# Altium PCB HLK-W806-KIT-V1.0.PcbDoc
Units mm, origin at the board's own origin, x right, y up, seen from the top; angles counter-clockwise.
Board outline 64 x 26 mm, 2 copper layers (Top Layer, Bottom Layer); 35 components, 59 nets, 194 pads, 212 vias.
Unrouted connection lines stored in the file: 23.
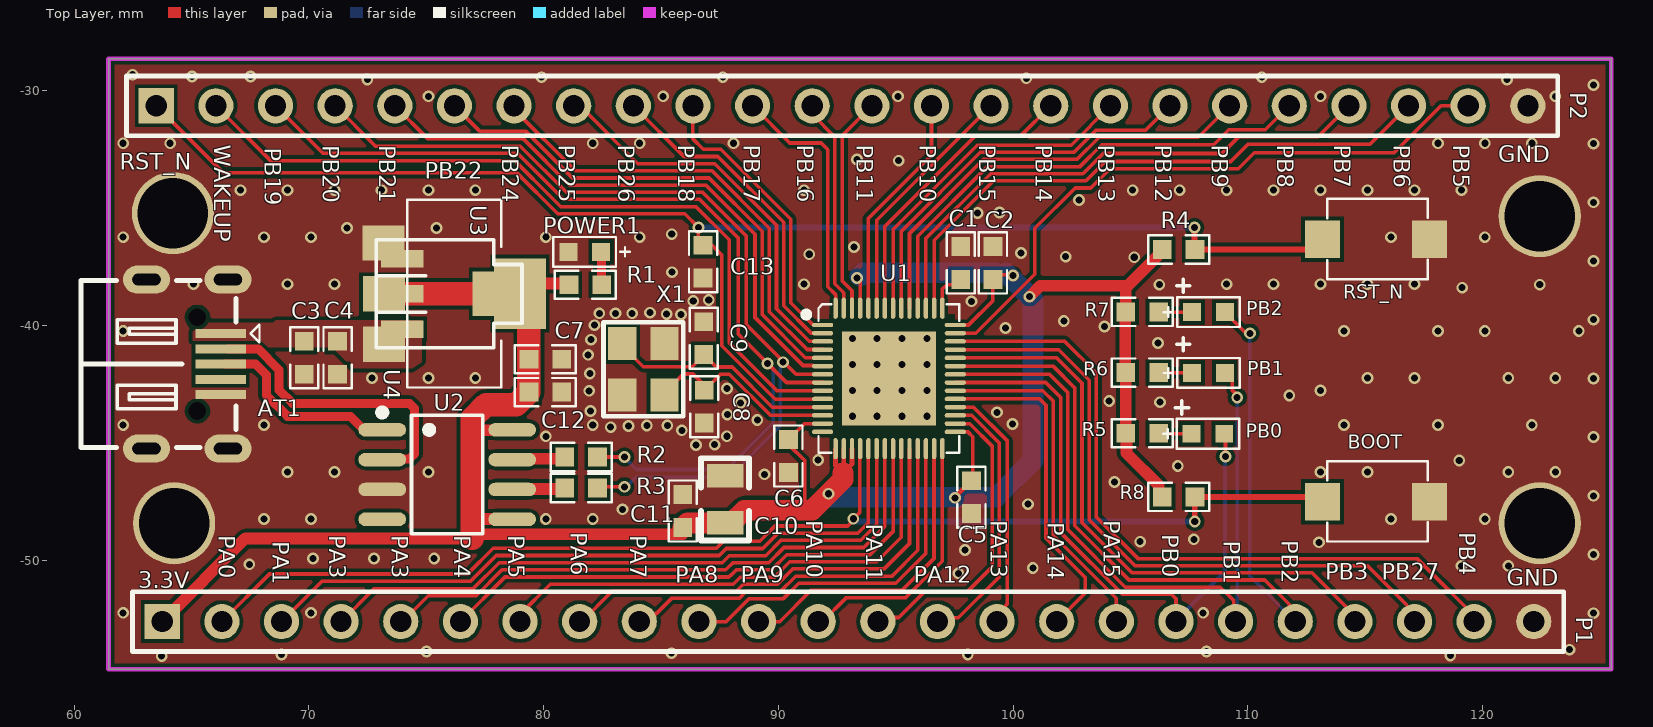
[diagram p0: Top Layer view]
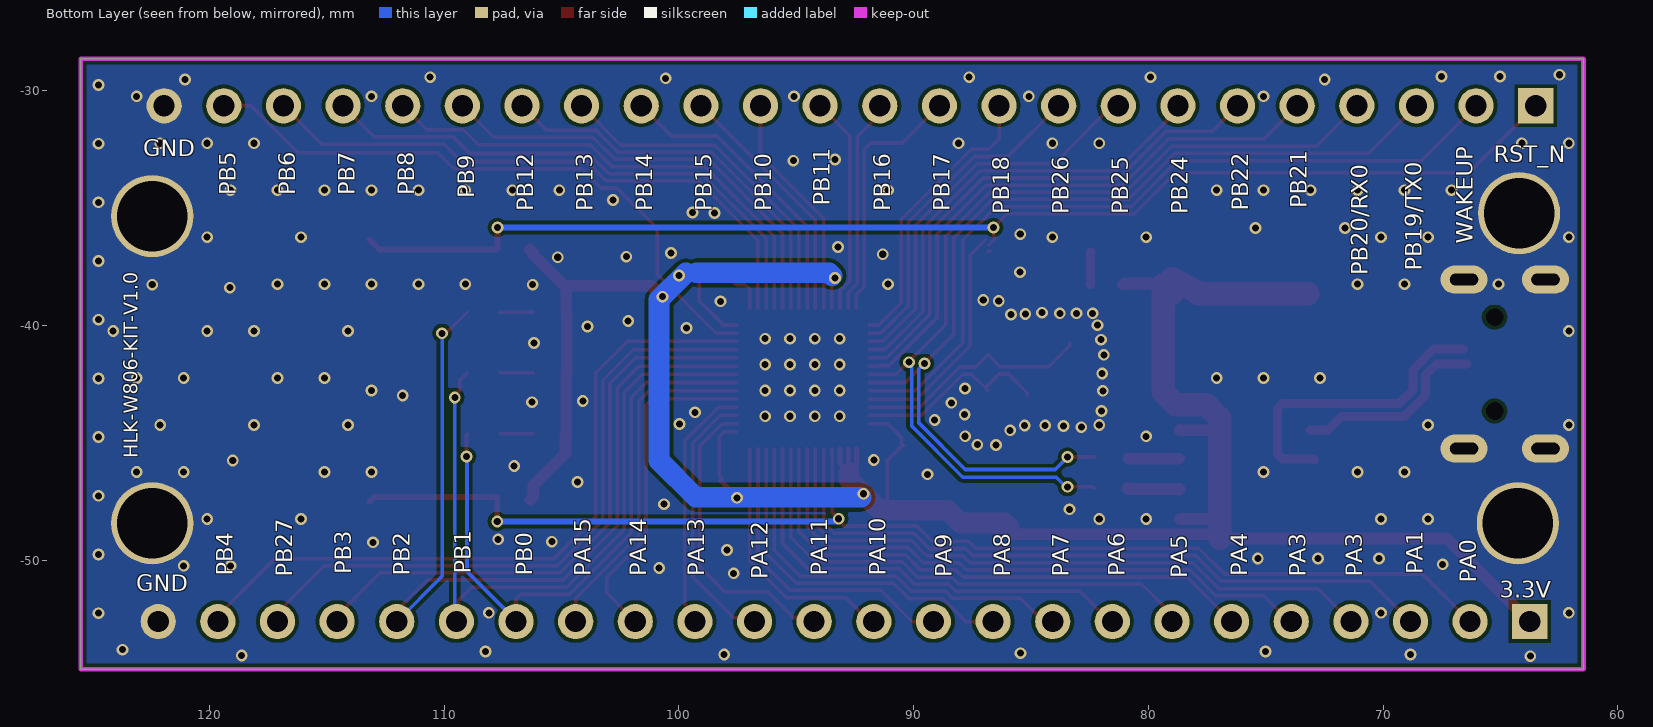
[diagram p1: Bottom Layer view, seen from below]

## Layer stack, top to bottom
Top Solder: solder mask 0.0102, Solder Resist, Dk 3.5
Top Layer: signal copper 0.0356
Dielectric 1: dielectric 0.32, FR-4, Dk 4.8
Bottom Layer: signal copper 0.0356
Bottom Solder: solder mask 0.0102, Solder Resist, Dk 3.5

## Board outline
61.468,-54.635 125.468,-54.635 125.468,-28.635 61.468,-28.635

## Design rules (kind name [scope] priority, off if disabled: settings)
Clearance [All] p1: gap=0.152 ignorepadtopadclearanceinfootprint=FALSE
PlaneConnect PlaneConnect_1 [InNet('5V')] p1: planeconnectstyle=Direct reliefexpansion=0.508 reliefentries=4 reliefconductorwidth=0.254 reliefairgap=0.254
PlaneConnect [All] p2: planeconnectstyle=Direct reliefexpansion=0.508 reliefentries=4 reliefconductorwidth=0.254 reliefairgap=0.254
PolygonConnect PolygonConnect_1 [InNet('5V')] p1: connectstyle=Direct reliefconductorwidth=0.254 reliefentries=4 polygonreliefangle="90 Angle" airgapwidth=0.254
PolygonConnect [All] p2: connectstyle=Direct reliefconductorwidth=0.254 reliefentries=4 polygonreliefangle="90 Angle" airgapwidth=0.254
RoutingVias [All] p1: holewidth=0.3 width=0.5 viastyle="Through Hole" minholewidth=0.3 minwidth=0.5 maxholewidth=0.5 maxwidth=0.7
SolderMaskExpansion [All] p1: expansion=0.102 istentingtop=FALSE
Width PWER [InNetClass('PWER')] p1: maxlimit=1 minlimit=0.5 preferedwidth=0.75
Width XINHAO [InNetClass('XINHAO')] p2: maxlimit=1 minlimit=0.254 preferedwidth=0.5
Width [All] p3: maxlimit=1 minlimit=0.152 preferedwidth=0.254
29 further rules are at their usual default settings.

## Components (designator, comment, footprint, x,y, rotation, side; value= is the part's Value field where it differs from the comment)
AT1 "micro usb" USB-MICRO_D 63.083,-41.635 r270 top
BOOT "按键" 正按小龟 113.179,-47.498 r0 top (schematic designator key1)
C1 "4.7pF" 0603 97.765,-37.327 r90 top
C2 "0.1uF" 0603 99.136,-37.327 r270 top
C3 "10UF" 0603_1 69.799,-41.365 r90 top
C4 "0.1UF" 0603_1 71.222,-41.365 r90 top
C5 "0.1uF" 0603 98.221,-47.301 r90 top
C6 "1uF" 0603 90.424,-45.551 r270 top
C7 "0.1UF" 0603_1 80.072,-41.428 r180 top
C8 "15pF" 0603 86.844,-43.449 r90 top
C9 "15pF" 0603 86.82,-40.528 r90 top
C10 "47uF" R0805 87.732,-47.396 r90 top
C11 "0.1uF" 0603 85.928,-47.893 r90 top
C12 "10UF" 0603_1 80.072,-42.825 r180 top value=100pF
C13 "0.1uF" 0603 86.792,-37.273 r270 top
P1 "Header 24" HDR1X24 63.754,-52.604 r0 top
P2 "Header 24" HDR1X24 63.5,-30.633 r0 top
PB0 "" 0603LED 107.594,-44.602 r0 top
PB1 "" 0603LED 107.62,-42.012 r0 top
PB2 "" 0603LED 107.62,-39.421 r0 top
POWER1 "" 0603LED 82.448,-36.855 r180 top
R1 "4.7K" 0603_1 81.777,-38.252 r0 top
R2 "0" 0603_1 81.599,-45.593 r0 top
R3 "0" 0603_1 81.599,-46.914 r0 top
R4 "10K" 0603_1 107.047,-36.754 r180 top
R5 "4.7K" 0603_1 105.497,-44.583 r0 top
R6 "4.7K" 0603_1 105.497,-41.999 r0 top
R7 "4.7K" 0603_1 105.497,-39.414 r0 top
R8 "10K" 0603_1 107.047,-47.295 r0 top
RST_N "按键" 正按小龟 113.179,-36.322 r0 top (schematic designator key2)
U1 "Component_1" "LCC56 - duplicate1" 94.709,-42.245 r0 top
U2 "CH340N" SOP8 75.918,-46.212 r270 top
U3 "AMS1117-3.3" AMS1117 75.819,-38.761 r90 top
U4 "AMS1117-3.3" SOT223 76.2,-38.253 r0 top
X1 "XTAL_40MHz" SMD-3225 84.252,-41.859 r270 top

## Footprints (in the part's own frame and the unit in brackets; to place one, negate y for a bottom-side part, rotate by r counter-clockwise, add the part's x,y. Pads: shape width x height; smd on the part's side, far side on the other; paste and mask are expansions set on the pad)
0603 [mm]
  rect 0.8x0.8 smd: 1(-0.7,0) 2(0.7,0)
  silkscreen extent -1.3,-0.6 1.3,0.6
0603_1 [mm]
  rect 0.8x0.8 smd: 1(-0.7,0) 2(0.7,0)
  silkscreen extent -1.3,-0.6 1.3,0.6
0603LED [mil] "0603贴片LED"
  rect 30x30 smd: 1(0,0) 2(55,0)
  silkscreen extent -48,-25 80,25
AMS1117 [mm]
  rect 1.9x1.8 smd: 0(0.118,-2.059)
  rect 0.75x1.8 smd: 1(1.618,1.841) 2(0.118,1.841) 3(-1.382,1.841)
  silkscreen extent -2.18,-3.26 2.42,2.94, body extent -2.13,-2.23 2.37,1.77, height 1.5
HDR1X24 [mm] "Connector; Header; 24 Position"
  rect 1.5x1.5 hole 0.9: 1(0,0)
  round 1.5 hole 0.9: 2(2.54,0) 3(5.08,0) 4(7.62,0) 5(10.16,0) 6(12.7,0) 7(15.24,0) 8(17.78,0) 9(20.32,0) 10(22.86,0) 11(25.4,0) 12(27.94,0) 13(30.48,0) 14(33.02,0) 15(35.56,0) 16(38.1,0) 17(40.64,0) 18(43.18,0) 19(45.72,0) 20(48.26,0) 21(50.8,0) 22(53.34,0) 23(55.88,0) 24(58.42,0)
  silkscreen extent -1.27,-1.27 59.69,1.27
"LCC56 - duplicate1" [mm]
  oval 0.9x0.19 smd: 1(-2.825,2.275) 2(-2.825,1.925) 3(-2.825,1.575) 4(-2.825,1.225) 5(-2.825,0.875) 6(-2.825,0.525) 7(-2.825,0.175) 8(-2.825,-0.175) 9(-2.825,-0.525) 10(-2.825,-0.875) 11(-2.825,-1.225) 12(-2.825,-1.575) 13(-2.825,-1.925) 14(-2.825,-2.275) 29(2.825,-2.275) 30(2.825,-1.925) 31(2.825,-1.575) 32(2.825,-1.225) 33(2.825,-0.875) 34(2.825,-0.525) 35(2.825,-0.175) 36(2.825,0.175) 37(2.825,0.525) 38(2.825,0.875) 39(2.825,1.225) 40(2.825,1.575) 41(2.825,1.925) 42(2.825,2.275)
  oval 0.19x0.9 smd: 15(-2.275,-2.99) 16(-1.925,-2.99) 17(-1.575,-2.99) 18(-1.225,-2.99) 19(-0.875,-2.99) 20(-0.525,-2.99) 21(-0.175,-2.99) 22(0.175,-2.99) 23(0.525,-2.99) 24(0.875,-2.99) 25(1.225,-2.99) 26(1.575,-2.99) 27(1.925,-2.99) 28(2.275,-2.99) 43(2.275,2.99) 44(1.925,2.99) 45(1.575,2.99) 46(1.225,2.99) 47(0.875,2.99) 48(0.525,2.99) 49(0.175,2.99) 50(-0.175,2.99) 51(-0.525,2.99) 52(-0.875,2.99) 53(-1.225,2.99) 54(-1.575,2.99) 55(-1.925,2.99) 56(-2.275,2.99)
  rect 4x4 smd mask+0.051: 57(0,0)
  silkscreen extent -3,-3.16 3,3.16
R0805 [mm]
  rect 1x1.55 smd: 1(-1,0) 2(1,0)
  silkscreen extent -1.75,-1.02 1.75,1.02
SMD-3225 [mm]
  rect 1.4x1.2 smd: 1(-1.1,-0.9) 2(1.1,-0.9) 3(1.1,0.9) 4(-1.1,0.9)
  silkscreen extent -2,-1.7 2,1.7
SOP8 [mm]
  oval 0.574x2.036 smd: 1(-1.777,-2.792) 2(-0.507,-2.792) 3(0.763,-2.792) 4(2.033,-2.792) 5(2.033,2.743) 6(0.763,2.743) 7(-0.507,2.743) 8(-1.777,2.743)
  silkscreen extent -2.67,-2.94 2.65,1.5
SOT223 [mm]
  rect 2.2x3 smd: 0(2.794,-0.381)
  rect 1.8x1.5 smd: 1(-3.017,1.772) 2(-2.995,-0.384) 3(-2.995,-2.534)
  silkscreen extent -2.01,-4.38 1.99,3.62
USB-MICRO_D [mm] "micro型USB ，6.7*7.5*2.5mm"
  round 0 hole 0.75 unplated: 0(-2,2.17) 0(2,2.17)
  rect 0.381x2.15 smd: 1(-1.3,3.16) 2(-0.65,3.16) 3(0,3.16) 4(0.65,3.16) 5(1.3,3.16)
  oval 1.2x2 hole 0.5 slot 1.2 at 90 deg: 6(3.6,3.47) 7(3.6,0) 8(-3.6,0) 9(-3.6,3.47)
  silkscreen extent -3.56,-2.79 3.56,4.81
正按小龟 [mm]
  rect 1.5x1.6 smd: 1(0,0) 2(4.55,0)
  silkscreen extent 0.2,-1.7 4.48,1.73

## Part data
AT1: library part USB-D
C1 C2 C5 C6 C8 C9 C10 C11 C13: library part "CAP NP_Dup1"
C3 C4 C7: library part CAP, "Capacitor"
C12: library part Cap, "Capacitor", LatestRevisionDate=17-Jul-2002, LatestRevisionNote="Re-released for DXP Platform.", PackageReference=RAD-0.3, Published=8-Jun-2000, Publisher="Altium Limited"
P1 P2: "Header, 24-Pin", LatestRevisionDate=17-Jul-2002, LatestRevisionNote="Re-released for DXP Platform.", Publisher="Altium Limited"
PB0 PB1 PB2 POWER1: library part LED
R1 R2 R3 R4 R5 R6 R7 R8: library part Res1, "Resistor", LatestRevisionDate=17-Jul-2002, LatestRevisionNote="Re-released for DXP Platform.", PackageReference=AXIAL-0.3, Published=8-Jun-2000, Publisher="Altium Limited"
U2: BOM_JLCPCB Part Class="Extended Part", BOM_Manufacturer="WCH(Jiangsu Qin Heng)", BOM_Manufacturer Part=CH340N, BOM_Supplier=LCSC, BOM_Supplier Part=C506813, Contributor=LCSC, spicePre=U, spiceSymbolName=CH340N
U3 U4: library part Component_1

## Free pads (board coordinates)
  round 3.5 hole 3 mask+0.051: 2(64.211,-35.204) 2(64.262,-48.413) 2(122.428,-48.413) 2(122.428,-35.332)

## Via types
v1: diameter 0.5, hole 0.3, Top Layer to Bottom Layer, tented both sides, 212 vias

## Nets (pads, with @x,y where several pads share a name; then routed paths per layer and width w, separated by ;. In a path a pad name is that pad's centre, name@x,y a point inside that pad or via, vN(x,y) a via of type N, cw(c..) or ccw(c..) an arc to the next point about the centre after c; other vN are vias at no path point)
5V: AT1.1 C3.2 C4.2 U3.3 U4.3
DM1: AT1.2 U2.2 | length 13.1
  Top Layer w0.381: AT1.2@66.57,-40.988 67.836,-40.988 68.726,-41.878 68.726,-42.734 69.304,-43.311 74.283,-43.311 74.506,-43.535 74.506,-45.455 74.283,-45.678 72.966,-45.678 U2.2@72.923,-45.721
DP1: AT1.3 U2.1 | length 8.4
  Top Layer w0.381: AT1.3@66.422,-41.635 67.239,-41.635 67.241,-41.637 67.731,-41.637 68.193,-42.099 68.193,-42.954 69.096,-43.858 71.767,-43.858 72.343,-44.434 U2.1
GND: AT1.5 AT1.6 AT1.7 AT1.8 AT1.9 BOOT.2 C1.2 C2.1 C3.1 C4.1 C5.1 C6.2 C7.1 C8.1 C9.2 C10.2 C11.2 C12.1 C13.2 P1.24 P2.24 pad.2 POWER1.2 RST_N.2 U1.57 U2.3 U3.1 U4.1 X1.2 X1.4
  other v1: 63.729,-54.077 118.618,-54.051 68.834,-54 98.069,-54 85.446,-53.95 75.006,-53.873 108.229,-53.873 123.698,-53.797 124.714,-52.244 62.091,-52.229 70.091,-52.229 108.091,-52.229 97.663,-50.546 100.838,-50.318 119.091,-50.229 121.091,-50.229 67.462,-50.165 70.18,-49.911 72.771,-49.911 75.336,-49.911 124.714,-49.744 97.942,-49.555 113.03,-49.225 105.41,-49.2 107.696,-49.098 68.091,-48.229 70.091,-48.229 80.091,-48.229 82.091,-48.229 116.091,-48.229 120.091,-48.229 83.354,-47.823 100.635,-47.6 124.714,-47.244 104.318,-46.66 89.408,-46.33 69.091,-46.229 71.091,-46.229 75.091,-46.229 113.091,-46.229 115.091,-46.229 121.091,-46.229 123.091,-46.229 107.01,-45.974 118.999,-45.746 91.694,-45.72 86.487,-45.085 87.284,-45.068 124.714,-44.744 80.091,-44.712 87.801,-44.708 85.888,-44.458 82.855,-44.323 83.617,-44.272 84.396,-44.255 85.268,-44.247 62.091,-44.229 68.091,-44.229 82.091,-44.229 114.091,-44.229 118.091,-44.229 122.091,-44.229 99.966,-44.182 89.103,-44.016 93.147,-43.856 94.206,-43.856 95.264,-43.856 96.322,-43.856 87.825,-43.783 99.314,-43.688 81.991,-43.637 88.392,-43.287 106.248,-43.256 104.089,-43.205 111.76,-42.977 81.94,-42.774 113.091,-42.763 93.147,-42.755 94.206,-42.755 95.264,-42.755 96.322,-42.755 87.808,-42.672 72.684,-42.229 75.091,-42.229 77.091,-42.229 115.091,-42.229 117.091,-42.229 121.091,-42.229 123.091,-42.229 124.714,-42.244 81.966,-42.037 93.147,-41.655 94.206,-41.655 95.264,-41.655 96.322,-41.655 81.899,-41.239 106.172,-40.742 82.018,-40.594 93.147,-40.554 94.206,-40.554 95.264,-40.554 96.322,-40.554 62.091,-40.229 114.091,-40.229 118.091,-40.229 120.091,-40.229 124.091,-40.229 99.674,-40.098 103.886,-40.031 82.169,-39.98 102.159,-39.802 124.714,-39.744 85.852,-39.522 85.242,-39.497 82.372,-39.472 83.058,-39.472 83.769,-39.472 84.531,-39.446 98.222,-38.964 86.373,-38.945 87.032,-38.91 119.126,-38.38 106.223,-38.252 122.428,-38.253 65.091,-38.229 69.091,-38.229 71.091,-38.229 91.091,-38.229 109.091,-38.229 111.091,-38.229 113.091,-38.229 115.091,-38.229 117.091,-38.229 85.472,-37.721 124.714,-37.244 105.156,-37.084 102.235,-37.059 91.313,-36.957 100.33,-36.906 93.218,-36.652 62.091,-36.229 68.091,-36.229 70.091,-36.229 80.091,-36.229 84.091,-36.229 116.091,-36.229 120.091,-36.229 85.456,-36.102 71.628,-35.84 75.438,-35.84 98.476,-35.204 99.416,-35.179 124.714,-34.744 102.808,-34.642 67.091,-34.229 69.091,-34.229 71.091,-34.229 73.091,-34.229 75.091,-34.229 77.091,-34.229 91.091,-34.229 105.091,-34.229 107.091,-34.229 109.091,-34.229 111.091,-34.229 113.091,-34.229 115.091,-34.229 117.091,-34.229 119.091,-34.229 95.123,-32.969 93.345,-32.918 62.091,-32.229 64.091,-32.229 82.091,-32.229 84.091,-32.229 88.091,-32.229 118.091,-32.229 120.091,-32.229 122.091,-32.229 124.714,-32.244 75.091,-30.229 85.091,-30.229 95.091,-30.229 113.091,-30.229 123.091,-30.229 124.714,-29.744 124.714,-29.744 72.492,-29.515 121.031,-29.515 100.559,-29.464 79.908,-29.413 87.63,-29.413 110.592,-29.413 65.024,-29.388 67.513,-29.388 62.484,-29.312
NetC1_1: C1.1 U1.43 | length 1.9
  Top Layer w0.152: U1.43 96.984,-38.437 97.168,-38.252 97.539,-38.252 C1.1 ; C1.1@97.642,-37.899 C1.1@97.765,-37.777
NetPB0_1: PB0.1 R5.2 | length 1.4
  Top Layer w0.152: R5.2 106.216,-44.602 PB0.1
NetPB1_1: PB1.1 R6.2 | length 1.4
  Top Layer w0.152: R6.2 106.21,-42.012 PB1.1
NetPB2_1: PB2.1 R7.2 | length 1.4
  Top Layer w0.152: R7.2 106.204,-39.421 PB2.1
NetPOWER1_1: POWER1.1 R1.2 | length 1.4
  Top Layer w0.381: POWER1.1 82.463,-36.87 82.463,-38.238 R1.2
NetR2_1: R2.1 U2.7 | length 2.3
  Top Layer w0.381: U2.7 U2.7@78.699,-45.667 ; R2.1@80.825,-45.667 R2.1
  Top Layer w0.5: U2.7@78.699,-45.667 R2.1@80.825,-45.667
NetR3_1: R3.1 U2.6 | length 2.3
  Top Layer w0.5: U2.6 78.676,-46.96 80.853,-46.96 R3.1
PA0/BOOT: BOOT.1 P1.2 R8.2 U1.18 | length 52.9
  Top Layer w0.152: P1.2 68.321,-50.577 76.757,-50.577 77.85,-49.484 79.655,-49.484 79.657,-49.482 87.359,-49.482 87.658,-49.184 89.203,-49.184 89.855,-48.532 92.951,-48.532 v1@93.196,-48.286 ; v1(93.191,-48.222) 93.472,-47.941 93.472,-45.401 93.478,-45.395 93.478,-45.24 U1.18
  Top Layer w0.254: v1(107.733,-48.335) 107.733,-47.308 R8.2 112.976,-47.295 BOOT.1
  Bottom Layer w0.254: v1@93.218,-48.286 93.266,-48.335 v1(107.733,-48.335)
PA1: P1.3 U1.19 | length 29.9
  Top Layer w0.152: P1.3 70.556,-50.882 76.883,-50.882 77.977,-49.789 79.781,-49.789 79.783,-49.787 87.486,-49.787 87.784,-49.488 89.33,-49.488 89.982,-48.836 93.384,-48.836 93.834,-48.387 U1.19
PA2: P1.4 U1.20 | length 27.8
  Top Layer w0.152: P1.4 72.782,-51.197 76.999,-51.197 78.103,-50.094 87.61,-50.094 87.91,-49.793 89.456,-49.793 90.108,-49.141 93.51,-49.141 94.184,-48.468 U1.20
PA3: P1.5 U1.21 | length 25.6
  Top Layer w0.152: P1.5 73.98,-52.604 75.083,-51.502 77.126,-51.502 78.229,-50.398 87.763,-50.398 88.063,-50.098 89.582,-50.098 90.234,-49.446 93.637,-49.446 94.534,-48.549 U1.21
PA4: P1.6 U1.22 | length 23.6
  Top Layer w0.152: P1.6 78.355,-50.703 87.889,-50.703 87.951,-50.641 87.965,-50.641 88.203,-50.403 89.708,-50.403 90.36,-49.751 93.901,-49.751 94.884,-48.768 U1.22
PA5: P1.7 U1.23 | length 21.7
  Top Layer w0.152: P1.7 78.994,-52.3 80.286,-51.008 88.073,-51.008 88.374,-50.708 89.835,-50.708 90.487,-50.056 94.194,-50.056 95.234,-49.016 U1.23
PA6: P1.8 U1.24 | length 19.5
  Top Layer w0.152: P1.8 81.622,-52.604 82.913,-51.313 88.2,-51.313 88.5,-51.012 89.961,-51.012 90.613,-50.36 94.499,-50.36 95.584,-49.276 U1.24
PA7: P1.9 U1.25 | length 17.5
  Top Layer w0.152: P1.9 84.439,-52.604 84.787,-52.256 84.805,-52.256 85.444,-51.618 88.326,-51.618 88.626,-51.317 90.087,-51.317 90.739,-50.665 94.836,-50.665 95.934,-49.568 U1.25
PA8: P1.10 U1.26 | length 15.3
  Top Layer w0.152: P1.10 87.77,-52.604 88.752,-51.622 90.213,-51.622 90.865,-50.97 95.002,-50.97 96.284,-49.689 U1.26
PA9: P1.11 U1.27 | length 13.3
  Top Layer w0.152: P1.11 90.056,-52.604 91.385,-51.275 95.266,-51.275 96.626,-49.916 96.626,-45.243 U1.27
PA10: P1.12 U1.28 | length 11.1
  Top Layer w0.152: P1.12 91.872,-52.604 92.896,-51.58 95.427,-51.58 96.978,-50.029 U1.28@96.978,-45.409 ; U1.28@96.984,-45.378 U1.28
PA11: P1.13 U1.30 | length 12.9
  Top Layer w0.152: P1.13 94.411,-52.427 95.123,-52.427 96.227,-51.324 98.055,-51.324 99.101,-50.278 99.101,-45.121 98.15,-44.17 U1.30
PA12: P1.14 U1.31 | length 11.5
  Top Layer w0.152: P1.14 96.933,-52.446 97.663,-52.446 99.405,-50.704 99.405,-44.994 98.231,-43.82 U1.31
PA13: P1.15 U1.32 | length 10.7
  Top Layer w0.152: U1.32 98.312,-43.47 99.754,-44.912 99.754,-51.841 99.314,-52.281 P1.15
PA14: P1.16 U1.33 | length 14.4
  Top Layer w0.152: U1.33 97.539,-43.115 97.693,-43.115 97.699,-43.11 101.124,-43.11 101.397,-43.382 101.397,-49.047 103.061,-50.711 103.061,-51.398 P1.16
PA15: P1.17 U1.34 | length 14.9
  Top Layer w0.152: U1.34 101.264,-42.77 101.702,-43.208 101.702,-48.756 101.713,-48.767 101.713,-48.932 104.394,-51.613 P1.17
PB0: P1.18 PB0.2 U1.35 | length 26.5
  Top Layer w0.152: U1.35 101.384,-42.42 102.017,-43.053 102.017,-48.806 104.654,-51.442 106.74,-51.442 106.934,-51.636 P1.18 ; PB0.2 109.042,-44.653 v1(109.042,-45.568)
  Bottom Layer w0.152: P1.18 106.934,-52.555 109.022,-50.467 109.022,-45.588 v1(109.042,-45.568)
PB1: P1.19 PB1.2 U1.36 | length 31
  Top Layer w0.152: U1.36@97.539,-42.075 101.555,-42.075 102.322,-42.843 102.322,-48.679 104.78,-51.137 108.824,-51.137 109.402,-51.715 109.402,-52.533 P1.19 ; PB1.2 109.322,-42.316 109.322,-42.738 109.542,-42.959 v1(109.542,-43.053)
  Bottom Layer w0.152: P1.19 109.542,-52.536 v1(109.542,-43.053)
PB2: P1.20 PB2.2 U1.37 | length 37.2
  Top Layer w0.152: U1.37 101.697,-41.72 102.627,-42.65 102.627,-48.525 104.934,-50.832 110.717,-50.832 111.756,-51.871 111.756,-52.347 P1.20 ; PB2.2 109.853,-40.257 110.018,-40.257 v1(110.084,-40.323)
  Bottom Layer w0.152: v1(110.084,-40.323) 110.084,-50.675 P1.20
PB3: P1.21 U1.38 | length 25.3
  Top Layer w0.152: U1.38 101.844,-41.37 102.932,-42.458 102.932,-48.399 105.06,-50.527 112.731,-50.527 P1.21@114.751,-52.548
PB4: P1.23 U1.40 | length 31.1
  Top Layer w0.152: U1.40 102.202,-40.67 103.541,-42.009 103.541,-48.147 105.313,-49.918 117.201,-49.918 P1.23@120.024,-52.74
PB5: P2.23 U1.41 | length 27
  Top Layer w0.152: U1.41 98.404,-40.32 100.919,-37.805 100.919,-35.854 102.637,-34.136 103.307,-34.136 104.132,-33.311 109.386,-33.311 109.388,-33.31 109.591,-33.31 110.266,-32.635 116.222,-32.635 118.224,-30.633 P2.23
PB6_TX1: P2.22 U1.44 | length 25.5
  Top Layer w0.152: U1.44 96.634,-36.362 99.164,-33.831 103.098,-33.831 103.922,-33.006 109.26,-33.006 109.987,-32.28 115.194,-32.28 P2.22
PB7_RX1: P2.21 U1.45 | length 23.3
  Top Layer w0.152: U1.45 96.284,-36.281 99.038,-33.526 102.971,-33.526 103.833,-32.664 108.895,-32.664 109.599,-31.96 112.973,-31.96 P2.21
PB8: P2.20 U1.46 | length 21.2
  Top Layer w0.152: U1.46 95.934,-36.191 98.903,-33.222 102.845,-33.222 103.774,-32.292 108.54,-32.292 109.177,-31.655 110.738,-31.655 P2.20
PB9: P2.19 U1.47 | length 19.1
  Top Layer w0.152: U1.47 95.584,-36.069 98.736,-32.917 102.719,-32.917 103.663,-31.972 107.881,-31.972 P2.19
PB10: P2.14 U1.52 | length 9.7
  Top Layer w0.152: U1.52 93.835,-39.254 93.835,-35.428 96.52,-32.742 P2.14
PB11: P2.13 U1.54 | length 9.3
  Top Layer w0.152: U1.54 93.134,-38.511 92.71,-38.087 92.71,-31.903 P2.13
PB12: P2.18 U1.48 | length 16.9
  Top Layer w0.152: U1.48@95.239,-39.25 95.239,-35.972 98.599,-32.612 102.593,-32.612 103.537,-31.668 105.646,-31.668 P2.18
PB13: P2.17 U1.49 | length 14.8
  Top Layer w0.152: U1.49@94.889,-39.25 94.889,-35.895 94.934,-35.849 94.934,-35.846 98.473,-32.307 102.466,-32.307 P2.17
PB14: P2.16 U1.50 | length 12.7
  Top Layer w0.152: U1.50 94.534,-35.771 98.384,-31.92 100.313,-31.92 P2.16
PB15: P2.15 U1.51 | length 10.6
  Top Layer w0.152: U1.51 94.184,-35.51 98.026,-31.668 P2.15
PB16: P2.12 U1.55 | length 9.2
  Top Layer w0.152: P2.12 91.44,-30.998 92.405,-31.963 92.405,-38.214 92.784,-38.592 U1.55
PB17: P2.11 U1.56 | length 10.9
  Top Layer w0.152: P2.11 90.484,-32.217 91.821,-32.217 92.1,-32.497 92.1,-38.34 92.434,-38.673 U1.56
PB18: P2.10 U1.1 | length 12.3
  Top Layer w0.152: P2.10 86.36,-32.046 86.804,-32.489 87.547,-32.489 90.528,-35.47 90.528,-39.018 91.462,-39.951 91.475,-39.951 91.494,-39.97 U1.1
PB19_TX0: P2.3 R2.2 U1.8 | length 41.8
  Top Layer w0.152: P2.3 70.603,-32.656 78.884,-32.656 80.85,-34.623 86.643,-34.623 88.283,-36.263 88.283,-40.355 90.348,-42.42 U1.8 ; R2.2 v1(83.439,-45.593)
  Bottom Layer w0.152: v1(83.439,-45.593) 83.972,-46.126 87.794,-46.126 89.773,-44.148 89.773,-41.835 v1@89.586,-41.648 ; v1(89.535,-41.605) 89.543,-41.605 v1@89.586,-41.648 ; v1@89.586,-41.554 v1@89.586,-41.648
PB20_RX0: P2.4 R3.2 U1.7 | length 39.4
  Top Layer w0.152: P2.4 72.838,-32.351 79.01,-32.351 80.977,-34.318 86.769,-34.318 88.628,-36.177 88.628,-39.947 90.751,-42.07 U1.7 ; R3.2 82.35,-46.863 v1(83.439,-46.863)
  Bottom Layer w0.152: v1(83.439,-46.863) 83.515,-46.863 83.928,-46.45 87.901,-46.45 90.077,-44.274 90.077,-41.766 90.195,-41.648 v1(90.195,-41.554) ; v1@90.246,-41.554 v1@90.246,-41.529
PB21: P2.5 U1.6 | length 24.9
  Top Layer w0.152: P2.5 75.056,-32.03 79.119,-32.03 81.103,-34.013 86.916,-34.013 89.004,-36.101 89.004,-39.652 91.045,-41.694 91.467,-41.694 91.494,-41.72 U1.6
PB22: P2.6 U1.5 | length 22.2
  Top Layer w0.152: P2.6 77.291,-31.725 79.246,-31.725 81.229,-33.708 87.042,-33.708 89.309,-35.975 89.309,-39.526 91.146,-41.363 91.876,-41.363 U1.5
PB24: P2.7 U1.4 | length 19.6
  Top Layer w0.152: P2.7 78.74,-30.788 81.355,-33.404 87.169,-33.404 89.614,-35.849 89.614,-39.4 91.227,-41.013 91.876,-41.013 U1.4
PB25: P2.8 U1.3 | length 16.8
  Top Layer w0.152: P2.8 81.547,-30.633 84.012,-33.099 87.295,-33.099 89.919,-35.722 89.919,-39.274 91.308,-40.663 91.876,-40.663 U1.3
PB26: P2.9 U1.2 | length 14.2
  Top Layer w0.152: P2.9 85.981,-32.794 87.421,-32.794 90.223,-35.596 90.223,-39.147 91.389,-40.313 91.876,-40.313 U1.2
PB27: P1.22 U1.39 | length 28.3
  Top Layer w0.152: U1.39 101.937,-41.02 103.237,-42.319 103.237,-48.273 105.186,-50.223 115.093,-50.223 116.745,-51.874 116.745,-51.891 P1.22@117.52,-52.666
RESET: C13.1 P2.1 R4.1 RST_N.1 U1.10 | length 63.8
  Top Layer w0.152: P2.1 64.806,-31.94 66.343,-33.476 78.842,-33.476 80.598,-35.232 86.007,-35.232 v1(86.592,-35.818) 86.592,-36.163 ; C13.1@86.487,-36.268 C13.1 ; C13.1@86.742,-36.823 C13.1@86.842,-36.823 ; C13.1@86.943,-36.336 87.592,-36.985 87.592,-40.854 89.871,-43.132 91.54,-43.132 91.545,-43.127 91.876,-43.127 U1.10
  Top Layer w0.254: v1(107.718,-35.813) 107.718,-36.725 R4.1 112.747,-36.754 RST_N.1
  Bottom Layer w0.254: v1(86.592,-35.818) 86.593,-35.817 107.715,-35.817 v1(107.718,-35.813)
VCC3_3: C2.2 C5.2 C6.1 C7.2 C10.1 C11.1 C12.2 P1.1 R1.1 R4.2 R5.1 R6.1 R7.1 R8.1 U1.13 U1.15 U1.16 U1.17 U1.29 U1.42 U1.53 U2.5 U2.8 U3.0 U3.2 U4.0 U4.2 | length 112.3
  Top Layer w0.152: 91.129,-47.625 91.129,-45.756 90.474,-45.101 90.424,-45.101 90.518,-45.007 90.518,-44.761 91.109,-44.17 U1.13 ; 92.713,-46.101 92.784,-46.03 ; U1.17@93.128,-45.24 U1.17 ; v1(93.35,-37.972) 93.484,-38.106 U1.53 ; U1.42 98.098,-39.97 99.136,-38.932 C2.2 99.328,-37.835 99.965,-37.835 v1(99.989,-37.859) ; U1.29@97.539,-44.525 98.074,-44.525 98.28,-44.731 98.28,-46.393 C5.2@98.147,-46.526
  Top Layer w0.2: v1(97.519,-47.331) 97.519,-47.303 C5.2
  Top Layer w0.203: U1.15 92.434,-45.822 92.434,-45.967 92.748,-46.281 93.128,-45.901 U1.17@93.128,-45.24 ; 92.784,-46.03 U1.16
  Top Layer w0.5: P1.1 67.298,-49.06 76.962,-49.06 ; 76.962,-48.882 C11.1@85.928,-48.882 ; 76.962,-47.981 77.211,-48.23 78.648,-48.23 U2.5 ; 76.962,-44.741 77.255,-44.448 78.648,-44.448 U2.8 ; U4.0@79.427,-38.202 81.026,-38.202 R1.1 ; v1(100.696,-38.762) 101.155,-38.303 104.797,-38.303 ; R6.1@104.773,-41.943 R7.1@104.773,-39.47 ; R6.1 R5.1 104.797,-44.707 104.824,-44.733 104.824,-45.423 106.197,-46.795 106.197,-47.288 R8.1@106.318,-47.409 ; R7.1 104.797,-38.303 ; R4.2 106.197,-36.904 106.197,-36.984 104.878,-38.303 104.797,-38.303
  Top Layer w0.889: C11.1 86.12,-48.402 87.401,-48.402 87.406,-48.396 88.007,-48.396 88.544,-47.859 91.431,-47.859 v1(92.131,-47.158) 92.748,-46.541 92.748,-46.281
  Top Layer w1: U4.2 U4.2 73.978,-38.636 U3.0@77.878,-38.636 ; 76.962,-49.06 76.962,-48.882 76.962,-47.981 76.962,-44.741 76.962,-43.944 77.548,-43.358 78.84,-43.358 C12.2 C7.2 ; U3.0@77.856,-38.602 78.726,-38.135 U4.0@78.994,-37.992 ; U4.0 U4.0@79.376,-38.252 ; C7.2@79.375,-41.428 U4.0@79.375,-38.634
  Bottom Layer w0.889: v1@92.239,-47.308 99.277,-47.308 100.838,-45.746 100.838,-38.888 99.695,-37.745 ; v1@93.472,-37.872 93.599,-37.745 99.259,-37.745
WAKEUP: P2.2 U1.9 | length 33.4
  Top Layer w0.152: P2.2 68.388,-32.982 70.497,-32.982 78.778,-32.982 80.366,-34.569 80.724,-34.928 86.49,-34.928 87.903,-36.341 87.903,-40.733 89.939,-42.77 U1.9
XIN: C8.2 U1.12 X1.3 | length 8.4
  Top Layer w0.152: X1.3 85.152,-42.859 85.955,-42.056 85.987,-42.056 86.36,-42.056 C8.2@86.875,-42.57 ; C8.2 87.531,-42.062 87.903,-42.062 89.661,-43.82 U1.12
XOUT: C9.1 U1.11 X1.1 | length 10.2
  Top Layer w0.152: X1.1 83.352,-40.859 84.244,-41.751 86.327,-41.751 86.496,-41.581 86.496,-41.552 C9.1 87.35,-41.757 88.029,-41.757 89.742,-43.47 U1.11
pads on no net: AT1.0 AT1.4 U1.14 U2.4

## Polygon pours and split planes (outlines as drawn)
GND on Top Layer "GND_L01_P014" (solid, pour order 14): 61.595,-28.829 125.484,-28.829 125.484,-54.508 61.595,-54.508
5V on Top Layer "5V_L01_P013" (solid, pour order 13): 65.046,-40.92 65.046,-39.878 68.479,-39.878 68.58,-39.777 74.803,-39.777 74.803,-41.555 74.422,-41.809 74.295,-41.809 71.882,-41.809 70.993,-40.92
no net on Top Layer "NONET_L01_P000" (solid, pour order 0): 66.584,-40.793
GND on Bottom Layer "GND_L02_P015" (solid, pour order 15): 61.595,-28.829 125.484,-28.829 125.484,-54.508 61.595,-54.508

## Keep-outs
Keep-Out Layer:
  the board outline again, w0.2

## Other copper
Top Layer:
  pour cut-out: 92.205,-39.485 97.497,-39.485 97.536,-39.523 97.536,-44.795 97.096,-45.235 92.175,-45.235 92.175,-39.515

## Silkscreen, mask and mechanical layers (free items; w line width, h text height)
Top Overlay:
  circle w0.254: c91.186,-39.523 r0.127
  lines w0.15: 106.909,-43.485 107.467,-43.485 ; 106.959,-40.792 107.518,-40.792 ; 106.959,-38.303 107.518,-38.303 ; 107.188,-43.764 107.188,-43.205 ; 107.239,-41.072 107.239,-40.513 ; 107.239,-38.583 107.239,-38.024
  text "WAKEUP" at 65.972,-32.292 h0.7 r270
  text "PB24" at 78.232,-32.284 h0.7 r270
  text "PB25" at 80.645,-32.284 h0.7 r270
  text "PB26" at 83.185,-32.284 h0.7 r270
  text "PB18" at 85.725,-32.284 h0.7 r270
  text "PB17" at 88.519,-32.284 h0.7 r270
  text "PB16" at 90.805,-32.284 h0.7 r270
  text "PB11" at 93.345,-32.284 h0.7 r270
  text "PB10" at 96.012,-32.284 h0.7 r270
  text "PB15" at 98.552,-32.284 h0.7 r270
  text "PB14" at 100.965,-32.284 h0.7 r270
  text "PB13" at 103.632,-32.284 h0.7 r270
  text "PB12" at 106.045,-32.284 h0.7 r270
  text "PB9" at 108.458,-32.284 h0.7 r270
  text "PB8" at 111.252,-32.284 h0.7 r270
  text "PB7" at 113.665,-32.284 h0.7 r270
  text "PB6" at 116.205,-32.284 h0.7 r270
  text "PB5" at 118.745,-32.284 h0.7 r270
  text "PB20" at 70.587,-32.309 h0.7 r270
  text "PB21" at 73,-32.309 h0.7 r270
  text "PB19" at 68.123,-32.41 h0.7 r270
  text "GND" at 120.65,-33.046 h0.7
  text "RST_N" at 61.951,-33.35 h0.7
  text "PB22" at 74.93,-33.731 h0.7
  text "PA10" at 91.186,-48.286 h0.7 r270
  text "PA13" at 99.038,-48.286 h0.7 r270
  text "PA15" at 103.848,-48.286 h0.7 r270
  text "PA14" at 101.461,-48.378 h0.7 r270
  text "PA11" at 93.748,-48.442 h0.7 r270
  text "PA6" at 81.153,-48.794 h0.7 r270
  text "PB4" at 118.999,-48.794 h0.7 r270
  text "PB0" at 106.346,-48.878 h0.7 r270
  text "PA0" at 66.167,-48.921 h0.7 r270
  text "PA3" at 70.866,-48.921 h0.7 r270
  text "PA3" at 73.533,-48.921 h0.7 r270
  text "PA4" at 76.2,-48.921 h0.7 r270
  text "PA5" at 78.486,-48.921 h0.7 r270
  text "PA7" at 83.693,-48.921 h0.7 r270
  text "PB2" at 111.434,-49.137 h0.7 r270
  text "PB1" at 108.966,-49.149 h0.7 r270
  text "PA1" at 68.453,-49.175 h0.7 r270
  text "PB3" at 113.284,-50.826 h0.7
  text "PB27" at 115.697,-50.826 h0.7
  text "PA8" at 85.598,-50.953 h0.7
  text "PA9" at 88.392,-50.953 h0.7
  text "PA12" at 95.758,-50.953 h0.7
  text "GND" at 121.031,-51.08 h0.7
  text "3.3V" at 62.738,-51.181 h0.7
Bottom Overlay:
  text "GND" at 122.809,-32.792 h0.7
  text "RST_N" at 65.278,-33.046 h0.7
  text "PB8" at 111.274,-34.451 h0.7 r270
  text "PB7" at 113.809,-34.451 h0.7 r270
  text "PB6" at 116.343,-34.451 h0.7 r270
  text "PB5" at 118.878,-34.451 h0.7 r270
  text "PB9" at 108.712,-34.57 h0.7 r270
  text "PB11" at 93.574,-34.9 h0.7 r270
  text "PB21" at 73.254,-35.001 h0.7 r270
  text "PB22" at 75.743,-35.103 h0.7 r270
  text "PB17" at 88.464,-35.117 h0.7 r270
  text "PB16" at 90.998,-35.117 h0.7 r270
  text "PB10" at 96.067,-35.117 h0.7 r270
  text "PB15" at 98.602,-35.117 h0.7 r270
  text "PB14" at 101.136,-35.117 h0.7 r270
  text "PB13" at 103.671,-35.117 h0.7 r270
  text "PB12" at 106.205,-35.117 h0.7 r270
  text "PB24" at 78.326,-35.251 h0.7 r270
  text "PB25" at 80.86,-35.251 h0.7 r270
  text "PB26" at 83.395,-35.251 h0.7 r270
  text "PB18" at 85.929,-35.251 h0.7 r270
  text "WAKEUP" at 66.192,-36.5 h0.7 r270
  text "PB19/TX0" at 68.351,-37.668 h0.7 r270
  text "PB20/RX0" at 70.663,-37.846 h0.7 r270
  text "HLK-W806-KIT-V1.0" at 122.86,-45.644 h1 r270
  text "PA1" at 68.321,-50.577 h0.7 r270
  text "PB1" at 108.864,-50.571 h0.7 r270
  text "PB3" at 113.944,-50.597 h0.7 r270
  text "PA10" at 91.186,-50.648 h0.7 r270
  text "PA11" at 93.675,-50.648 h0.7 r270
  text "PB0" at 106.248,-50.648 h0.7 r270
  text "PB2" at 111.455,-50.648 h0.7 r270
  text "PB4" at 118.999,-50.648 h0.7 r270
  text "PA4" at 75.794,-50.673 h0.7 r270
  text "PA6" at 81.001,-50.673 h0.7 r270
  text "PA13" at 98.908,-50.673 h0.7 r270
  text "PA14" at 101.397,-50.673 h0.7 r270
  text "PA15" at 103.759,-50.673 h0.7 r270
  text "PA3" at 70.891,-50.698 h0.7 r270
  text "PA3" at 73.304,-50.698 h0.7 r270
  text "PA7" at 83.388,-50.698 h0.7 r270
  text "PA8" at 85.877,-50.698 h0.7 r270
  text "PA9" at 88.374,-50.708 h0.7 r270
  text "PB27" at 116.459,-50.698 h0.7 r270
  text "PA5" at 78.349,-50.75 h0.7 r270
  text "PA12" at 96.202,-50.804 h0.7 r270
  text "PA0" at 66.04,-50.953 h0.7 r270
  text "GND" at 123.114,-51.308 h0.7
  text "3.3V" at 65.024,-51.588 h0.7